# EAGLE board eBOOK-UPDATE v6 (EAGLE 9.7.0)
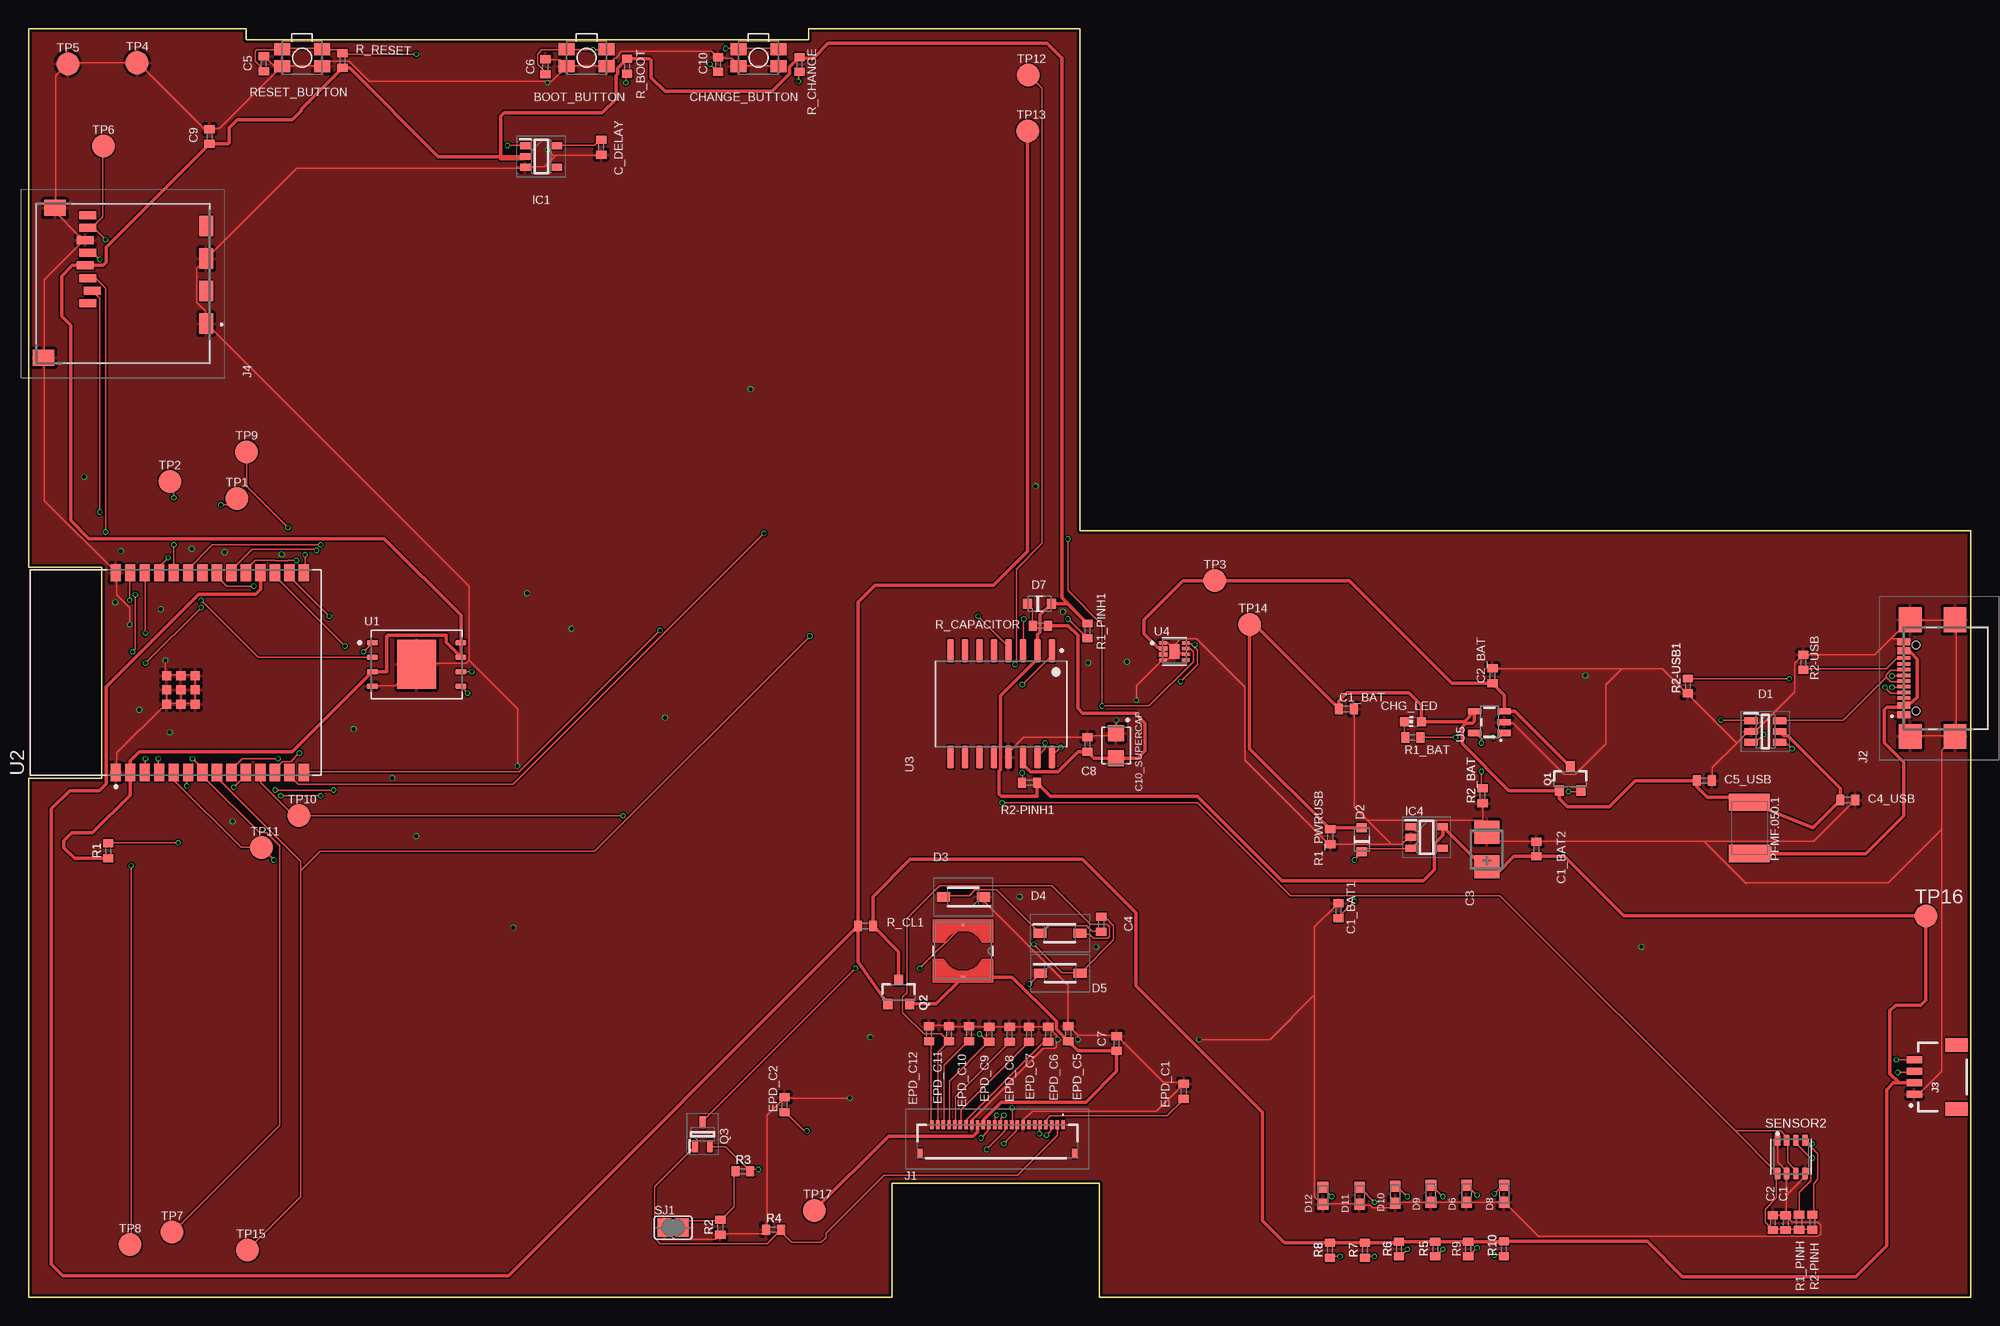
[diagram p0: board, top side]
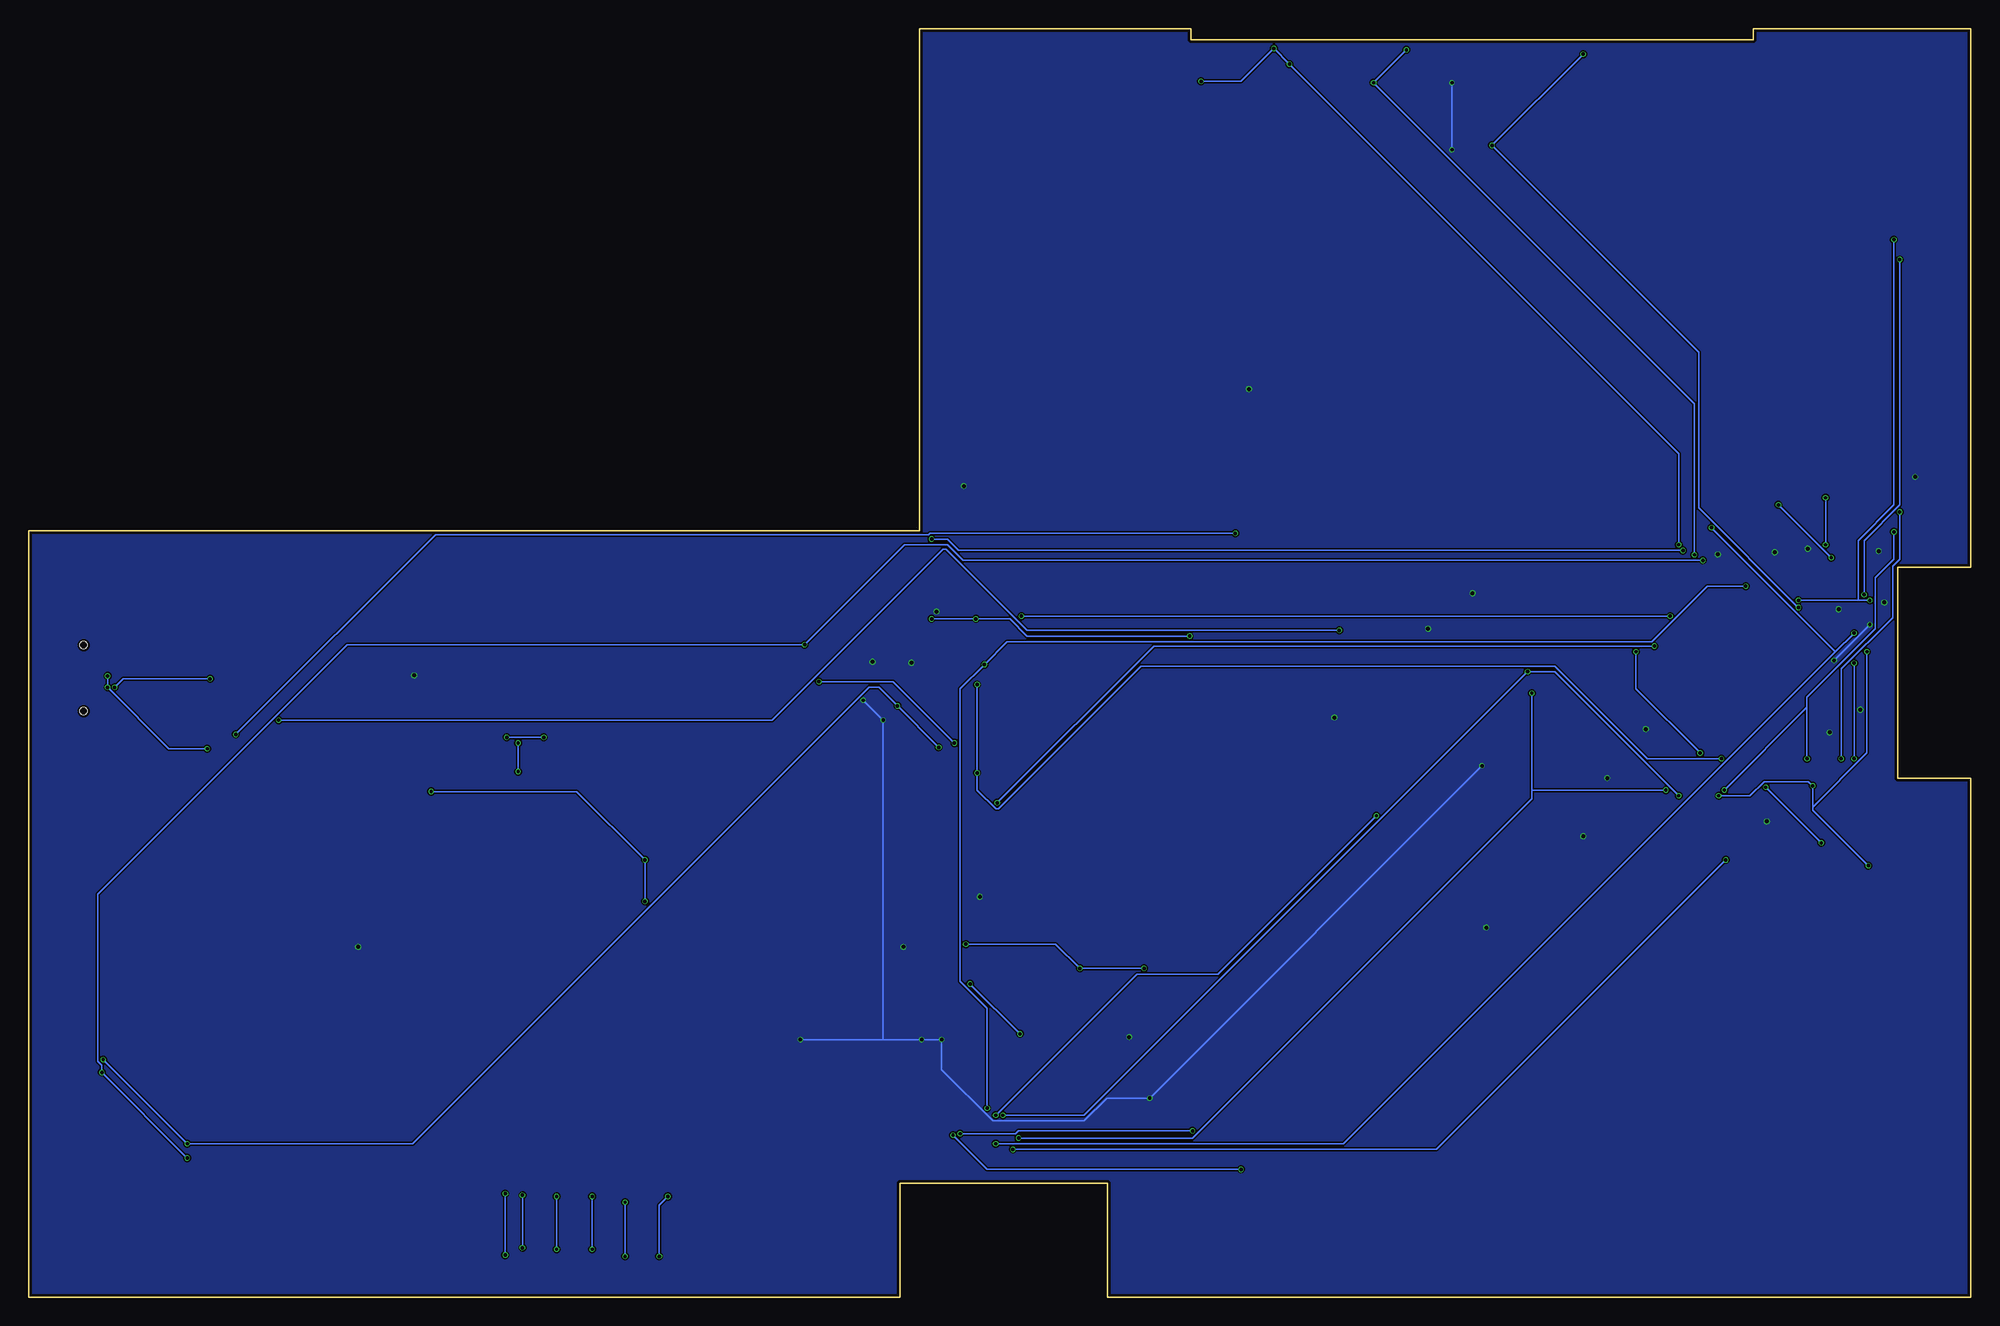
[diagram p1: board, bottom side, seen from below]

Size 170.3 x 111.2 mm. Coordinates in mm from the lower left corner, seen from the top.
Outline: 0,111.2 19.1,111.2 19.1,110.2 68.4,110.2 68.4,111.2 92.2,111.2 92.2,67.2 170.3,67.2 170.3,0 93.9,0 93.9,10 75.7,10 75.7,0 0,0 0,45.5 6.4,45.5 6.4,64 0,64 0,111.2
Copper layers (1*16): Top 0.035mm / dielectric 1.6mm / Bottom 0.035mm
Design rules "jlcpcb-2layers.dru *": minimum track width 5mil, minimum drill 0.3mm, track to track 5mil, track to pad 5mil, pad to pad 5mil, via to via 5mil, smd to smd 5mil, copper to edge 0.2mm, drill to drill 6mil, minimum pad ring 10mil, minimum via ring 3mil, stop-mask expansion 4mil, vias tented up to drill 0mil, thermal gap 10mil
Net classes: 0 default: width 0.15 mm; 1 POWER: width 0.3 mm

## Footprints (pad centres in the part's own frame; a part is rotated, then mirrored left to right if it is on the bottom)
MYBUTTON = smd 1.4 x 1.05: 1 1.75,0.75; 2 -1.75,0.75; 3 -1.75,-0.75; 4 1.75,-0.75
ESP32_WROVER_EAGLE-LTSPICE_C0402 = smd 0.7 x 0.9: 1 -0.65,0; 2 0.65,0
RCL_CT3528 = smd 2 x 2.2: + -1.5,0; - 1.5,0
CAPCP3225X100N = smd 1.4 x 1.4: 1 -1.1,0; 2 1.1,0
ADAFRUIT_CHIP-LED0603 = smd 0.8 x 0.8: A 0,-0.75; C 0,0.75
SOT95P280X145-6N = smd 1.2 x 0.6: 1 -1.25,0.95; 2 -1.25,0; 3 -1.25,-0.95; 4 1.25,-0.95; 5 1.25,0; 6 1.25,0.95
ESP32_WROVER_AVX---SD0805S020S1R0_AVX_SD0805S020S1R0_0 = smd 0.8 x 0.9: 1 -1.05,0; 2 1.05,0
SOD3716X135N = smd 1.15 x 0.8: 1 -1.75,0; 2 1.75,0
DIOC1608X36N = smd 0.97 x 0.94: 1 -0.75,0; 2 0.75,0
SOT95P280X125-5N = smd 0.9 x 0.6: 1 -1.4,0.95; 2 -1.4,0; 3 -1.4,-0.95; 4 1.4,-0.95; 5 1.4,0.95
SOT95P280X120-5N = smd 0.9 x 0.6: 1 -1.4,0.95; 2 -1.4,0; 3 -1.4,-0.95; 4 1.4,-0.95; 5 1.4,0.95
FH34SRJ24S05SH99 = smd 0.3 x 0.8: 1 5.75,1.45; 2 5.25,1.45; 3 4.75,1.45; 4 4.25,1.45; 5 3.75,1.45; 6 3.25,1.45; 7 2.75,1.45; 8 2.25,1.45; 9 1.75,1.45; 10 1.25,1.45; 11 0.75,1.45; 12 0.25,1.45; 13 -0.25,1.45; 14 -0.75,1.45; 15 -1.25,1.45; 16 -1.75,1.45; 17 -2.25,1.45; 18 -2.75,1.45; 19 -3.25,1.45; 20 -3.75,1.45; 21 -4.25,1.45; 22 -4.75,1.45; 23 -5.25,1.45; 24 -5.75,1.45 | smd 0.4 x 0.8: MP1 6.75,-1.05; MP2 -6.75,-1.05
SAMACSYS_PARTS_USB4110GFA = smd 0.3 x 1.15: A1 -3.35,3.678; A4 -2.55,3.678; A5 -1.25,3.678; A6 -0.25,3.678; A7 0.25,3.678; A8 1.25,3.678; A9 2.55,3.678; A12 3.35,3.678; B1 3.05,3.678; B4 2.25,3.678; B5 1.75,3.678; B6 0.75,3.678; B7 -0.75,3.678; B8 -1.75,3.678; B9 -2.25,3.678; B12 -3.05,3.678 | smd 2.18 x 2: MP1 -5.11,-0.827; MP2 5.11,-0.827; MP3 -5.11,3.103; MP4 5.11,3.103 | hole 0.65: -2.89,2.603; 2.89,2.603
JST04_1MM_RA = smd 0.6 x 1.35: 1 -1.5,0; 2 -0.5,0; 3 0.5,0; 4 1.5,0 | smd 1.2 x 2: NC1 2.8,-3.675; NC2 -2.8,-3.675
112ATAARR03ATTEND = smd 1.8 x 1.2: G1 10.6,10.4; G2 4.9,10.4; S1 7.75,10.4; S2 2.05,10.4 | smd 1.4 x 1.9: G3 13.6,-3.85; G4 0.45,-2.85 | smd 0.7 x 1.5: P1 8.8,0; P2 7.7,0.4; P3 6.6,0; P4 5.5,-0.2; P5 4.4,0; P6 3.3,-0.2; P7 2.2,0; P8 1.1,0
IND_4828-WE-TPC_WRE = smd 0.254 x 0.254: 1 -2.286,0 | smd 0.254 x 0.381: 2 2.286,0
ESP32C6_VARISTOR_CT/CN1812 = smd 1.5 x 3.6: 1 -2.25,0; 2 2.25,0
ESP32_WROVER_SPARKFUN-DISCRETESEMI_SOT23-3 = smd 0.8 x 0.9: 1 -0.95,-1; 2 0.95,-1; 3 0,1.1
SOT65P210X110-3N = smd 1.05 x 0.5: 1 -1.05,0.65; 2 -1.05,-0.65; 3 1.05,0
ESP32_WROVER_EAGLE-LTSPICE_R0402 = smd 0.7 x 0.9: 1 -0.65,0; 2 0.65,0
ESP32_WROVER_BME680_PSON80P300X300X100-8N = smd 1.016 x 0.5: 1 1.458,1.2; 2 1.458,0.4; 3 1.458,-0.4; 4 1.458,-1.2; 5 -1.458,-1.22; 6 -1.458,-0.4; 7 -1.458,0.4; 8 -1.458,1.2
SJ = smd 1.168 x 1.6: 1 -0.762,0; 2 0.762,0
TP20R = smd 2 x 2: TP 0,0
SON127P600X800X80-9N = smd 0.94 x 0.44: 1 -3.895,1.905; 2 -3.895,0.635; 3 -3.895,-0.635; 4 -3.895,-1.905; 5 3.895,-1.905; 6 3.895,-0.635; 7 3.895,0.635; 8 3.895,1.905 | smd 3.4 x 4.3: 9 0,0
XCVR_ESP32-C6-WROOM-1-N8 = smd 1.5 x 0.9: 1 -8.75,5.26; 2 -8.75,3.99; 3 -8.75,2.72; 4 -8.75,1.45; 5 -8.75,0.18; 6 -8.75,-1.09; 7 -8.75,-2.36; 8 -8.75,-3.63; 9 -8.75,-4.9; 10 -8.75,-6.17; 11 -8.75,-7.44; 12 -8.75,-8.71; 13 -8.75,-9.98; 14 -8.75,-11.25; 15 8.75,-11.25; 16 8.75,-9.98; 17 8.75,-8.71; 18 8.75,-7.44; 19 8.75,-6.17; 20 8.75,-4.9; 21 8.75,-3.63; 22 8.75,-2.36; 23 8.75,-1.09; 24 8.75,0.18; 25 8.75,1.45; 26 8.75,2.72; 27 8.75,3.99; 28 8.75,5.26 | smd 0.8 x 0.8: 29_1 -2.755,0.79; 29_2 -1.505,0.79; 29_3 -0.255,0.79; 29_4 -2.755,-0.46; 29_5 -1.505,-0.46; 29_6 -0.255,-0.46; 29_7 -2.755,-1.71; 29_8 -1.505,-1.71; 29_9 -0.255,-1.71
SOIC127P1032X265-16N = smd 2.05 x 0.59: 1 -4.655,4.445; 2 -4.655,3.175; 3 -4.655,1.905; 4 -4.655,0.635; 5 -4.655,-0.635; 6 -4.655,-1.905; 7 -4.655,-3.175; 8 -4.655,-4.445; 9 4.655,-4.445; 10 4.655,-3.175; 11 4.655,-1.905; 12 4.655,-0.635; 13 4.655,0.635; 14 4.655,1.905; 15 4.655,3.175; 16 4.655,4.445
SON50P200X200X80-9N = smd 0.76 x 0.27: 1 -0.985,0.75; 4 -0.985,-0.75; 5 0.985,-0.75; 6 0.985,-0.25; 7 0.985,0.25; 8 0.985,0.75 | smd 0.813 x 0.406: 2 -0.985,0.25; 3 -0.985,-0.25 | smd 0.9 x 1.3: 9 0,0
ESP32_WROVER_SPARKFUN-IC-POWER_SOT23-5 = smd 0.55 x 1.2: 1 -0.95,-1.3; 2 0,-1.3; 3 0.95,-1.3; 4 0.95,1.3; 5 -0.95,1.3

## Placement (x,y rotation side)
BOOT_BUTTON  BUTTON_CUSYOMV1  [MYBUTTON]  48.93,108.62 180 top
C1  100nF  [ESP32_WROVER_EAGLE-LTSPICE_C0402]  154.05,6.54 90 top
C1_BAT  4.7uF  [ESP32_WROVER_EAGLE-LTSPICE_C0402]  115.54,51.56 0 top
C1_BAT1  4.7uF  [ESP32_WROVER_EAGLE-LTSPICE_C0402]  114.85,33.88 90 top
C1_BAT2  4.7uF  [ESP32_WROVER_EAGLE-LTSPICE_C0402]  132.19,39.28 90 top
C2  100nF  [ESP32_WROVER_EAGLE-LTSPICE_C0402]  152.93,6.54 90 top
C2_BAT  4.7uF  [ESP32_WROVER_EAGLE-LTSPICE_C0402]  128.35,54.46 90 top
C3  100uF TANT  [RCL_CT3528]  127.85,39.24 90 top
C4  4.7uF/25V  [ESP32_WROVER_EAGLE-LTSPICE_C0402]  94.05,32.7 90 top
C4_USB  100nF  [ESP32_WROVER_EAGLE-LTSPICE_C0402]  159.5,43.58 0 top
C5  1uF  [ESP32_WROVER_EAGLE-LTSPICE_C0402]  20.63,108.12 90 top
C5_USB  4.7uF  [ESP32_WROVER_EAGLE-LTSPICE_C0402]  146.91,45.28 0 top
C6  100nF  [ESP32_WROVER_EAGLE-LTSPICE_C0402]  45.31,107.84 90 top
C7  10uF  [ESP32_WROVER_EAGLE-LTSPICE_C0402]  95.4,22.24 90 top
C8  100nF  [ESP32_WROVER_EAGLE-LTSPICE_C0402]  92.85,48.44 90 top
C9  100nF  [ESP32_WROVER_EAGLE-LTSPICE_C0402]  15.87,101.74 90 top
C10  100nF  [ESP32_WROVER_EAGLE-LTSPICE_C0402]  60.45,108.04 90 top
C10_SUPERCAP  CPH3225A  [CAPCP3225X100N]  95.36,48.35 270 top
C_DELAY  100nF  [ESP32_WROVER_EAGLE-LTSPICE_C0402]  50.21,100.8 270 top
CHANGE_BUTTON  BUTTON_CUSYOMV1  [MYBUTTON]  64,108.62 180 top
CHG_LED  [ADAFRUIT_CHIP-LED0603]  121.38,50.45 90 top
D1  USBLC6-2SC6Y  [SOT95P280X145-6N]  152.28,49.58 0 top
D2  ESP32_WROVER_AVX---SD0805S020S1R0_AVX_SD0805S020S1R0_0_0AVX_SD0805S020S1R0_0_0  [ESP32_WROVER_AVX---SD0805S020S1R0_AVX_SD0805S020S1R0_0]  116.89,40.09 90 top
D3  MBR0530  [SOD3716X135N]  81.96,35.08 180 top
D4  MBR0530  [SOD3716X135N]  90.42,31.89 0 top
D5  MBR0530  [SOD3716X135N]  90.46,28.39 0 top
D6  PGB1010603MR  [DIOC1608X36N]  126.08,9.08 90 top
D7  ESP32_WROVER_AVX---SD0805S020S1R0_AVX_SD0805S020S1R0_0_0AVX_SD0805S020S1R0_0_0  [ESP32_WROVER_AVX---SD0805S020S1R0_AVX_SD0805S020S1R0_0]  88.64,60.79 0 top
D8  PGB1010603MR  [DIOC1608X36N]  129.36,9.08 90 top
D9  PGB1010603MR  [DIOC1608X36N]  122.94,9.08 90 top
D10  PGB1010603MR  [DIOC1608X36N]  119.82,8.98 90 top
D11  PGB1010603MR  [DIOC1608X36N]  116.7,8.88 90 top
D12  PGB1010603MR  [DIOC1608X36N]  113.48,8.88 90 top
EPD_C1  1uF/50V  [ESP32_WROVER_EAGLE-LTSPICE_C0402]  101.28,18.06 90 top
EPD_C2  1uF/50V  [ESP32_WROVER_EAGLE-LTSPICE_C0402]  66.29,16.86 90 top
EPD_C5  0.1uF/50V  [ESP32_WROVER_EAGLE-LTSPICE_C0402]  91.15,23.1 90 top
EPD_C6  1uF/50V  [ESP32_WROVER_EAGLE-LTSPICE_C0402]  89.4,23.06 90 top
EPD_C7  1uF/50V  [ESP32_WROVER_EAGLE-LTSPICE_C0402]  87.71,23.06 90 top
EPD_C8  1uF/50V  [ESP32_WROVER_EAGLE-LTSPICE_C0402]  86.02,23.06 90 top
EPD_C9  1uF/50V  [ESP32_WROVER_EAGLE-LTSPICE_C0402]  84.23,23.06 90 top
EPD_C10  1uF/50V  [ESP32_WROVER_EAGLE-LTSPICE_C0402]  82.45,23.1 90 top
EPD_C11  1uF/50V  [ESP32_WROVER_EAGLE-LTSPICE_C0402]  80.71,23.08 90 top
EPD_C12  1uF/50V  [ESP32_WROVER_EAGLE-LTSPICE_C0402]  78.95,23.1 90 top
IC1  BD5229G-TR  [SOT95P280X125-5N]  44.95,99.98 0 top
IC4  XC6220A331MR-G  [SOT95P280X120-5N]  122.58,40.3 0 top
J1  FH34SRJ-24S-0.5SH_99_  [FH34SRJ24S05SH99]  84.95,13.65 0 top
J2  SAMACSYS_PARTS_USB4110-GF-A  [SAMACSYS_PARTS_USB4110GFA]  168.07,54.26 90 top
J3  QWIIC_RIGHT_ANGLE  [JST04_1MM_RA]  165.35,19.3 90 top
J4  112A-TAAR-R03_ATTEND  [112ATAARR03ATTEND]  5.18,95.93 270 top
L1  68uH  [IND_4828-WE-TPC_WRE]  81.93,30.35 270 top
PFMF.050.1  ESP32C6_VARISTORCN1812  [ESP32C6_VARISTOR_CT/CN1812]  150.88,41.14 90 top
Q1  20V/4.2A/52mΩ/1.4W  [ESP32_WROVER_SPARKFUN-DISCRETESEMI_SOT23-3]  135.16,45.41 0 top
Q2  20V/4.2A/52mΩ/1.4W  [ESP32_WROVER_SPARKFUN-DISCRETESEMI_SOT23-3]  76.28,26.71 0 top
Q3  SI1308EDL-T1-GE3  [SOT65P210X110-3N]  59.09,14.29 90 top
R1  10K  [ESP32_WROVER_EAGLE-LTSPICE_R0402]  6.99,39.12 90 top
R1_BAT  200  [ESP32_WROVER_EAGLE-LTSPICE_R0402]  121.36,49.06 0 top
R1_PINH  10K  [ESP32_WROVER_EAGLE-LTSPICE_R0402]  155.23,6.58 90 top
R1_PINH1  10K  [ESP32_WROVER_EAGLE-LTSPICE_R0402]  92.85,58.4 90 top
R1_PWRUSB  100K  [ESP32_WROVER_EAGLE-LTSPICE_R0402]  114.12,40.35 90 top
R2  2.2  [ESP32_WROVER_EAGLE-LTSPICE_R0402]  60.65,6.12 90 top
R2-PINH  10K  [ESP32_WROVER_EAGLE-LTSPICE_R0402]  156.39,6.58 90 top
R2-PINH1  10K  [ESP32_WROVER_EAGLE-LTSPICE_R0402]  87.77,45.1 0 top
R2-USB  5k1  [ESP32_WROVER_EAGLE-LTSPICE_R0402]  155.59,55.64 90 top
R2-USB1  5k1  [ESP32_WROVER_EAGLE-LTSPICE_R0402]  145.47,53.58 90 top
R2_BAT  2K  [ESP32_WROVER_EAGLE-LTSPICE_R0402]  127.48,43.94 90 top
R3  0.47  [ESP32_WROVER_EAGLE-LTSPICE_R0402]  62.62,11.04 0 top
R4  10K  [ESP32_WROVER_EAGLE-LTSPICE_R0402]  65.31,5.92 0 top
R5  10K  [ESP32_WROVER_EAGLE-LTSPICE_R0402]  123.33,4.22 90 top
R6  10K  [ESP32_WROVER_EAGLE-LTSPICE_R0402]  120.15,4.22 90 top
R7  10K  [ESP32_WROVER_EAGLE-LTSPICE_R0402]  117.17,4.12 90 top
R8  10K  [ESP32_WROVER_EAGLE-LTSPICE_R0402]  114.09,4.12 90 top
R9  10K  [ESP32_WROVER_EAGLE-LTSPICE_R0402]  126.21,4.22 90 top
R10  10K  [ESP32_WROVER_EAGLE-LTSPICE_R0402]  129.34,4.24 90 top
R_BOOT  10K  [ESP32_WROVER_EAGLE-LTSPICE_R0402]  52.48,107.88 90 top
R_CAPACITOR  15  [ESP32_WROVER_EAGLE-LTSPICE_R0402]  88.72,58.85 0 top
R_CHANGE  10K  [ESP32_WROVER_EAGLE-LTSPICE_R0402]  67.59,108.05 90 top
R_CL1  10K  [ESP32_WROVER_EAGLE-LTSPICE_R0402]  73.37,32.54 0 top
R_RESET  10K  [ESP32_WROVER_EAGLE-LTSPICE_R0402]  27.53,108.4 270 top
RESET_BUTTON  BUTTON_CUSYOMV1  [MYBUTTON]  23.99,108.65 180 top
SENSOR2  ESP32_WROVER_BME680_BME680  [ESP32_WROVER_BME680_PSON80P300X300X100-8N]  154.54,12.3 90 top
SJ1  [SJ]  56.51,6.1 0 top
TP1  TPTP20R  [TP20R]  18.26,70 0 top
TP2  TPTP20R  [TP20R]  12.38,71.5 0 top
TP3  TPTP20R  [TP20R]  104,62.8 0 top
TP4  TPTP20R  [TP20R]  9.52,108.2 0 top
TP5  TPTP20R  [TP20R]  3.44,108.1 0 top
TP6  TPTP20R  [TP20R]  6.56,100.9 0 top
TP7  TPTP20R  [TP20R]  12.58,5.7 0 top
TP8  TPTP20R  [TP20R]  8.9,4.6 0 top
TP9  TPTP20R  [TP20R]  19.12,74.1 0 top
TP10  TPTP20R  [TP20R]  23.7,42.22 0 top
TP11  TPTP20R  [TP20R]  20.44,39.4 0 top
TP12  TPTP20R  [TP20R]  87.65,107.12 0 top
TP13  TPTP20R  [TP20R]  87.6,102.22 0 top
TP14  TPTP20R  [TP20R]  107.05,58.97 0 top
TP15  TPTP20R  [TP20R]  19.2,4.12 0 top
TP16  TPTP20R  [TP20R]  166.35,33.42 0 top
TP17  TPTP20R  [TP20R]  68.89,7.6 0 top
U1  W25Q512JVEIQ  [SON127P600X800X80-9N]  34.03,55.46 0 top
U2  ESP32-C6-WROOM-1-N8  [XCVR_ESP32-C6-WROOM-1-N8]  12.9,54.74 90 top
U3  DS3231SN#  [SOIC127P1032X265-16N]  85.29,52 270 top
U4  MAX17048G+T10  [SON50P200X200X80-9N]  100.47,56.6 0 top
U5  ESP32_WROVER_SPARKFUN-IC-POWER_MCP73831  [ESP32_WROVER_SPARKFUN-IC-POWER_SOT23-5]  128.08,50.4 90 top

## Library data of the parts
BOOT_BUTTON CHANGE_BUTTON CHG_LED PFMF.050.1 RESET_BUTTON SJ1 TP1-TP17 = DeskAssistant v19 v1
C1 C1_BAT C1_BAT1 C1_BAT2 C2 C2_BAT C4 C4_USB C5 C5_USB C6-C10 C_DELAY EPD_C1 EPD_C2 EPD_C5-EPD_C12 = DeskAssistant v19 v1; SPICEMODEL: NONE; SPICEPREFIX: C
C3 = DeskAssistant v19 v1; SPICEPREFIX: C
C10_SUPERCAP = DeskAssistant v19 v1; AVAILABILITY: Not in stock; CHECK_PRICES: https://www.snapeda.com/parts/CPH3225A/Seiko+Instruments/view-part/?ref=eda; DESCRIPTION: 11 mF (EDLC) Supercapacitor 3.3 V 1210 (3225 Metric) - -; MF: Seiko Instruments; MP: CPH3225A; PACKAGE: 1210 Seiko; PRICE: None; PURCHASE-URL: https://www.snapeda.com/api/url_track_click_mouser/?unipart_id=562593&manufacturer=Seiko Instruments&part_name=CPH3225A&search_term=None; SNAPEDA_LINK: https://www.snapeda.com/parts/CPH3225A/Seiko+Instruments/view-part/?ref=snap
D1 = DeskAssistant v19 v1; AVAILABILITY: In Stock; CHECK_PRICES: https://www.snapeda.com/parts/USBLC6-2SC6Y/STMicroelectronics/view-part/?ref=eda; DESCRIPTION: 17V Clamp 5A (8/20µs) Ipp Tvs Diode Surface Mount SOT-23-6; MF: STMicroelectronics; MP: USBLC6-2SC6Y; PACKAGE: SOT-23-6 STMicroelectronics; PRICE: None; SNAPEDA_LINK: https://www.snapeda.com/parts/USBLC6-2SC6Y/STMicroelectronics/view-part/?ref=snap
D2 D7 = DeskAssistant v19 v1; CENTROID_NOT_SPECIFIED: No; DATASHEET: http://datasheets.avx.com/schottky.pdf; DIGIKEY_DESCRIPTION: DIODE SCHOTTKY 20V 1A 0805; DIGIKEY_PART_NUMBER: 478-7800-1-ND; LEAD_FREE: yes; MF: AVX; MOUSER_PART_NUMBER: 581-SD0805S020S1R0; PACKAGE: 0805 (2012 metric); PREFIX: D; ROHS: yes; TEMPERATURE_RANGE_HIGH: +125°C; TEMPERATURE_RANGE_LOW: -55°C
D3-D5 = DeskAssistant v19 v1; AVAILABILITY: In Stock; CHECK_PRICES: https://www.snapeda.com/parts/MBR0530/Onsemi/view-part/?ref=eda; DESCRIPTION: Diode Schottky 30 V 500mA Surface Mount SOD-123; MF: ON Semiconductor; MP: MBR0530; PACKAGE: SOD-123-2 ON Semiconductor; PRICE: None; PURCHASE-URL: https://www.snapeda.com/api/url_track_click_mouser/?unipart_id=179458&manufacturer=ON Semiconductor&part_name=MBR0530&search_term=None; SNAPEDA_LINK: https://www.snapeda.com/parts/MBR0530/Onsemi/view-part/?ref=snap
D6 D8-D12 = DeskAssistant v19 v1; AVAILABILITY: In Stock; CHECK_PRICES: https://www.snapeda.com/parts/PGB1010603MR/Littelfuse/view-part/?ref=eda; DESCRIPTION: 150V (Typ) Clamp - Ipp Tvs Diode Surface Mount 0603 (1608 Metric); MF: Littelfuse Inc.; MP: PGB1010603MR; PACKAGE: 0603 Littelfuse Inc.; PRICE: None; PURCHASE-URL: https://www.snapeda.com/api/url_track_click_mouser/?unipart_id=5659453&manufacturer=Littelfuse Inc.&part_name=PGB1010603MR&search_term=None; SNAPEDA_LINK: https://www.snapeda.com/parts/PGB1010603MR/Littelfuse/view-part/?ref=snap
IC1 = DeskAssistant v19 v1; DESCRIPTION: Voltage Detector with Adjustable Delay Time: CMOS processes are utilized to develop high precision, low current consumption CMOS reset ICs that allow arbitrary setting of the delay time. The extensive lineup includes both Nch Open Drain and CMOS output types in a wide range of detection voltages (from 2.3V to 6.0V, in 0.1V steps), enabling selection of the ideal solution based on customer requirements. In addition, the entire series is of course both lead-free and RoHS-compliant.; HEIGHT: 1.25mm; MANUFACTURER_NAME: ROHM Semiconductor; MANUFACTURER_PART_NUMBER: BD5229G-TR; MOUSER_PART_NUMBER: 755-BD5229G-TR; MOUSER_PRICE-STOCK: https://www.mouser.co.uk/ProductDetail/ROHM-Semiconductor/BD5229G-TR?qs=4kLU8WoGk0vvnhrrYwdszw%3D%3D
IC4 = DeskAssistant v19 v1; DESCRIPTION: LDO Voltage Regulators; HEIGHT: 1.2mm; MANUFACTURER_NAME: Torex; MANUFACTURER_PART_NUMBER: XC6220A331MR-G; MOUSER_PART_NUMBER: 865-XC6220A331MR-G; MOUSER_PRICE-STOCK: https://www.mouser.co.uk/ProductDetail/Torex-Semiconductor/XC6220A331MR-G?qs=AsjdqWjXhJ8ZSWznL1J0gg%3D%3D
J1 = DeskAssistant v19 v1; DESCRIPTION: 24 Position FFC, FPC Connector Contacts, Top and Bottom 0.020" (0.50mm) Surface Mount, Right Angle; HEIGHT: 1.1mm; MANUFACTURER_NAME: Hirose; MANUFACTURER_PART_NUMBER: FH34SRJ-24S-0.5SH(99); MOUSER_PART_NUMBER: 798-FH34SRJ24S05SH99; MOUSER_PRICE-STOCK: https://www.mouser.co.uk/ProductDetail/Hirose-Connector/FH34SRJ-24S-0.5SH99?qs=vcbW%252B4%252BSTIpKBl5ap9J8Fw%3D%3D
J2 = DeskAssistant v19 v1; DESCRIPTION: CONN USB 2.0 TYPE-C R/A SMT; HEIGHT: 3.26mm; MANUFACTURER_NAME: GCT (GLOBAL CONNECTOR TECHNOLOGY); MANUFACTURER_PART_NUMBER: USB4110-GF-A; MOUSER_PART_NUMBER: 640-USB4110-GF-A; MOUSER_PRICE-STOCK: https://www.mouser.co.uk/ProductDetail/GCT/USB4110-GF-A?qs=KUoIvG%2F9IlYiZvIXQjyJeA%3D%3D
J3 = DeskAssistant v19 v1; PROD_ID: CONN-13694
J4 = DeskAssistant v19 v1; DESCRIPTION: Micro SD Card Socket, Push-Push Type, Top Mount, SMT, H=1.83mm, 10u; HEIGHT: 1.9mm; MANUFACTURER_NAME: ATTEND; MANUFACTURER_PART_NUMBER: 112A-TAAR-R03 ATTEND
L1 = DeskAssistant v19 v1; COPYRIGHT: Copyright (C) 2024 Ultra Librarian. All rights reserved.; MANUFACTURER_PART_NUMBER: 744043680; MFR_NAME: Wurth Electronics
Q1 Q2 = DeskAssistant v19 v1; PROD_ID: TRAN-14388
Q3 = DeskAssistant v19 v1; AVAILABILITY: In Stock; CHECK_PRICES: https://www.snapeda.com/parts/SI1308EDL-T1-GE3/Vishay+Siliconix/view-part/?ref=eda; DESCRIPTION: Si1308EDL-T1-GE3 N-channel MOSFET Transistor, 1.5 A, 30 V, 3-Pin SC-70 | Siliconix / Vishay SI1308EDL-T1-GE3; MF: Vishay Siliconix; MP: SI1308EDL-T1-GE3; PACKAGE: SOT-323 Vishay Semiconductor; PRICE: None; PURCHASE-URL: https://www.snapeda.com/api/url_track_click_mouser/?unipart_id=274603&manufacturer=Vishay Siliconix&part_name=SI1308EDL-T1-GE3&search_term=None; SNAPEDA_LINK: https://www.snapeda.com/parts/SI1308EDL-T1-GE3/Vishay+Siliconix/view-part/?ref=snap
R1 R1_BAT R1_PINH R1_PINH1 R1_PWRUSB R2 R2-PINH R2-PINH1 R2-USB R2-USB1 R2_BAT R3-R10 R_BOOT R_CAPACITOR R_CHANGE R_CL1 R_RESET = DeskAssistant v19 v1; SPICEMODEL: NONE; SPICEPREFIX: R
SENSOR2 = DeskAssistant v19 v1; AVAILABILITY: Unavailable; DESCRIPTION: Integrated Environmental Unit; MF: Bosch Sensortec; MP: BME680; PACKAGE: LGA-8 Bosch Tools; PRICE: None
U1 = DeskAssistant v19 v1; AVAILABILITY: In Stock; CHECK_PRICES: https://www.snapeda.com/parts/W25Q512JVEIQ/Winbond+Electronics/view-part/?ref=eda; DESCRIPTION: FLASH - NOR Memory IC 512Mb (64M x 8) SPI - Quad I/O 133 MHz 8-WSON (8x6); MF: Winbond Electronics; MP: W25Q512JVEIQ; PACKAGE: Package; PRICE: None; SNAPEDA_LINK: https://www.snapeda.com/parts/W25Q512JVEIQ/Winbond+Electronics/view-part/?ref=snap
U2 = DeskAssistant v19 v1; AVAILABILITY: In Stock; CHECK_PRICES: https://www.snapeda.com/parts/ESP32-C6-WROOM-1-N8/Espressif+Systems/view-part/?ref=eda; DESCRIPTION: Multiprotocol Modules ESP32-C6 module, Wi-Fi 6 in 2.4 GHz band, Bluetooth 5, Zigbee 3.0 and Thread. ESP34-WROOM Compatible - ENGINEERING SAMPLE; MF: Espressif Systems; MP: ESP32-C6-WROOM-1-N8; PACKAGE: None; PRICE: None; SNAPEDA_LINK: https://www.snapeda.com/parts/ESP32-C6-WROOM-1-N8/Espressif+Systems/view-part/?ref=snap
U3 = DS3231SN_; AVAILABILITY: Not in stock; CHECK_PRICES: https://www.snapeda.com/parts/DS3231SN%23/Maxim+Integrated/view-part/?ref=eda; DESCRIPTION: Real Time Clock (RTC) IC Clock/Calendar I2C, 2-Wire Serial 16-SOIC (0.295, 7.50mm Width); MF: Maxim Integrated Products; MP: DS3231SN#; PACKAGE: None; PRICE: None; SNAPEDA_LINK: https://www.snapeda.com/parts/DS3231SN%23/Maxim+Integrated/view-part/?ref=snap
U4 = DeskAssistant v19 v1; AVAILABILITY: In Stock; CHECK_PRICES: https://www.snapeda.com/parts/MAX17048G+T10/Analog+Devices/view-part/?ref=eda; DESCRIPTION: 3µA 1-Cell/2-Cell Fuel Gauge with ModelGauge; MF: Analog Devices; MP: MAX17048G+T10; PACKAGE: TDFN-8 Maxim; PRICE: None; PURCHASE-URL: https://www.snapeda.com/api/url_track_click_mouser/?unipart_id=329239&manufacturer=Analog Devices&part_name=MAX17048G+T10&search_term=None; SNAPEDA_LINK: https://www.snapeda.com/parts/MAX17048G+T10/Analog+Devices/view-part/?ref=snap
U5 = DeskAssistant v19 v1; PROD_ID: IC-09995

## Nets
3V3 [POWER]: C1_BAT2.1 C3.+ C9.1 D7.2 IC1.2 IC4.5 J3.2 J4.P4 Q2.3 R1.1 R1_PINH1.2 R2-PINH1.2 R5.2 R6.2 R7.2 R8.2 R9.2 R10.2 R_BOOT.2 R_CHANGE.2 R_CL1.2 R_RESET.2 TP16.TP U1.3 U1.7 U1.8 U2.2 U3.2
32KHZ: R2-PINH1.1 U2.9 U3.1
DN: D1.4 J2.A7 J2.B7
DP: D1.6 J2.A6 J2.B6
EPD_3V3 [POWER]: C7.1 EPD_C5.1 J1.15 J1.16 L1.2 Q2.2 TP17.TP
EPD_3V3_C [POWER]: Q2.1 R_CL1.1 TP13.TP U2.18
EPD_BUSY: J1.9 TP9.TP U2.26
EPD_CS: J1.12 TP10.TP U2.11
EPD_DC: J1.11 TP11.TP U2.5
EPD_RST: J1.10 TP12.TP U2.21
FLASH_CS: U1.1 U2.12
GDR: J1.2 Q3.1 R4.2
GND: BOOT_BUTTON.1 BOOT_BUTTON.2 C1.2 C1_BAT1.2 C1_BAT2.2 C1_BAT.2 C2.2 C2_BAT.2 C3.- C4_USB.2 C5.2 C5_USB.2 C6.2 C7.2 C8.2 C9.2 C10.2 C10_SUPERCAP.1 C_DELAY.2 CHANGE_BUTTON.1 CHANGE_BUTTON.2 D1.2 D3.1 D6.1 D8.1 D9.1 D10.1 D11.1 D12.1 EPD_C1.2 EPD_C2.2 EPD_C5.2 EPD_C6.2 EPD_C7.2 EPD_C8.2 EPD_C9.2 EPD_C10.2 EPD_C11.2 EPD_C12.2 IC1.3 IC4.2 J1.8 J1.17 J2.A1 J2.A12 J2.B1 J2.B12 J2.MP1 J2.MP2 J2.MP3 J2.MP4 J3.1 J4.G1 J4.G2 J4.G3 J4.G4 J4.P6 R1_PWRUSB.1 R2-USB1.1 R2-USB.2 R2.1 R2_BAT.1 R4.1 RESET_BUTTON.1 RESET_BUTTON.2 SENSOR2.1 SENSOR2.5 SENSOR2.7 SJ1.1 TP4.TP TP5.TP U1.4 U1.9 U2.1 U2.28 U2.29_1 U2.29_2 U2.29_3 U2.29_4 U2.29_5 U2.29_6 U2.29_7 U2.29_8 U2.29_9 U3.13 U4.1 U4.4 U4.6 U4.9 U5.2
GPIO8: R1.2 U2.10
I2C_PW: C1.1 C2.1 R1_PINH.1 R2-PINH.1 SENSOR2.2 SENSOR2.6 SENSOR2.8 U2.17
INT_RTC: R1_PINH1.1 TP15.TP U2.8 U3.3
IO/BOOT: BOOT_BUTTON.3 BOOT_BUTTON.4 C6.1 R_BOOT.1 U2.15
IO/CHANGE: C10.1 CHANGE_BUTTON.3 CHANGE_BUTTON.4 R_CHANGE.1 U2.23
MISO: J4.P7 TP6.TP U1.2 U2.27
MOSI: J1.14 J4.P3 TP7.TP U1.5 U2.7
N$1: D7.1 R_CAPACITOR.1
N$2: D8.2 R10.1
N$3: D6.2 R9.1
N$4: D9.2 R5.1
N$5: D10.2 R6.1
N$6: D11.2 R7.1
N$7: D12.2 R8.1
N$8: C_DELAY.1 IC1.5
N$9: J2.A5 R2-USB1.2
N$10: C1_BAT1.1 D2.1 IC4.1 IC4.3 Q1.2
N$11: R1_BAT.2 U5.1
N$12: CHG_LED.C R1_BAT.1
N$13: J2.B5 R2-USB.1
N$16: R2_BAT.2 U5.5
N$20: EPD_C10.1 J1.22
N$22: C4.1 D3.2 D4.1
N$23: EPD_C12.1 J1.24
N$25: EPD_C8.1 J1.20
N$26: EPD_C7.1 J1.19
N$27: EPD_C6.1 J1.18
N$28: EPD_C2.1 J1.5
N$30: EPD_C1.1 J1.4
PREVGH: D5.1 EPD_C9.1 J1.21
PREVGL: D4.2 EPD_C11.1 J1.23
RESE: J1.3 Q3.2 R3.2
RESE': R2.2 R3.1 SJ1.2
RESET: C5.1 IC1.1 R_RESET.1 RESET_BUTTON.3 RESET_BUTTON.4 U2.3
RTC_RST: U2.16 U3.4
RX: TP2.TP U2.24
SCK: J1.13 J4.P5 TP8.TP U1.6 U2.6
SCL: J3.4 R2-PINH.2 SENSOR2.4 U2.20 U3.16 U4.7
SDA: J3.3 R1_PINH.2 SENSOR2.3 U2.19 U3.15 U4.8
SRC: C4.2 D5.2 L1.1 Q3.3
SS_SD: J4.P2 U2.4
TX: TP1.TP U2.25
USB_D+: D1.1 U2.14
USB_D-: D1.3 U2.13
VBAT [POWER]: C2_BAT.1 Q1.3 TP3.TP U4.2 U4.3 U5.3
VBUS [POWER]: C1_BAT.1 C4_USB.1 C5_USB.1 CHG_LED.A D1.5 D2.2 PFMF.050.1.2 Q1.1 R1_PWRUSB.2 TP14.TP U5.4
VRTC [POWER]: C8.1 C10_SUPERCAP.2 R_CAPACITOR.2 U3.14
VUSB [POWER]: J2.A4 J2.A9 J2.B4 J2.B9 PFMF.050.1.1

## Tracks (layer width: path | path; a pad name or v marks a point on that pad's centre or on a via)
3V3
  Top 0.3: R_CHANGE.2 67.5,108.61 | 67.5,108.61 66.73,107.84 66.73,107.23 65.19,105.7 55.8,105.7 54.6,106.9 54.6,108.4 54.47,108.53 R_BOOT.2 51.66,107.71 51.66,107.23 51.5,107.08 51.5,105 50.3,103.8 41.7,103.8 41.4,103.5 41.4,99.8 43.37,99.8 IC1.2 35.92,99.98 28.15,107.75 R_RESET.2 23.9,104.12 23.9,104 23.1,103.2 18.3,103.2 17.6,102.5 17.6,101.2 17.49,101.09 C9.1 6.8,92.02 6.8,90.7 6.53,90.43 J4.P4 3.83,90.43 2.9,89.5 2.9,86 3.7,85.2 3.7,68.1 5.3,66.5 31.2,66.5 37.92,59.78 U1.8 U1.7 36.6,57.42 36.6,58 31.5,58 31.4,57.9 31.4,54.8 30.16,54.8 U1.3 23.11,47.8 9.7,47.8 8.91,47.01 U2.2 8.91,44.01 5.6,40.7 3.8,40.7 3.1,40 3.1,39.4 4.03,38.47 R1.1 | 67.5,108.61 68.81,108.61 70.1,109.9 89.3,109.9 90.6,108.6 90.6,61.3 R1_PINH1.2 91.11,60.79 D7.2 88.7,59.8 88.7,58.28 88.47,58.05 U3.2 88.5,56.62 88.5,56 85.23,52.73 85.23,46.25 85.1,46.12 85.1,44.1 85.3,43.9 88.4,43.9 88.42,43.92 R2-PINH1.2 89.62,43.9 102.5,43.9 109.9,36.5 122.3,36.5 123.25,37.45 123.25,39.77 123.98,40.49 IC4.5 127.49,37.74 C3.+ 128.39,37.2 128.8,37.2 130.23,38.63 C1_BAT2.1 134.67,38.63 139.88,33.42 TP16.TP 166.35,26.05 165.9,25.6 163.7,25.6 163.2,25.1 163.2,19.6 164,18.8 J3.2 163.5,18.8 162.9,18.2 162.9,4.5 160.2,1.8 145,1.8 141.91,4.89 R10.2 129.32,4.87 R9.2 R5.2 R6.2 120.05,4.77 R7.2 R8.2 110.13,4.77 108.2,6.7 108.2,16.2 97.1,27.3 97.1,33.7 92.4,38.4 77.3,38.4 74.02,35.12 R_CL1.2 76.28,30.28 Q2.3
32KHZ  (via drill 0.3)
  Top 0.15: v87.12,45.95 87.12,45.2 R2-PINH1.1 | v87.12,53.7 89.62,56.2 89.62,56.58 U3.1 | v21.88,47.2 18.75,47.2 17.88,46.33 17.88,46.08 U2.9
  Bottom 0.15: v87.12,53.7 v87.12,45.95 87.12,44.45 85.5,42.83 85.25,42.83 72.75,55.33 36.5,55.33 28.38,47.2 v21.88,47.2
DN  (via drill 0.3)
  Top 0.15: v163.38,53.45 164.38,53.45 J2.B7 | v163.38,54.45 164.38,54.45 J2.A7 | v154.62,48.08 154.12,48.58 153.62,48.58 D1.4
  Bottom 0.15: v163.38,54.45 v163.38,53.45 158,48.08 v154.62,48.08
DP
  Top 0.15: 162.88,54.33 163.25,53.95 164.38,53.95 J2.A6 | 162.88,54.33 162.88,54.58 163.25,54.95 164.38,54.95 J2.B6 | 162.88,54.33 159.12,50.58 153.62,50.58 D1.6
EPD_3V3
  Top 0.3: TP17.TP 75.39,14.1 82.8,14.1 83.2,14.5 J1.16 J1.15 83.77,15.17 83.77,15.61 85.26,17.1 92.7,17.1 95.4,19.8 C7.1 92.01,21.59 EPD_C5.1 90.13,23.47 90.13,24.17 86.24,28.06 L1.2 79.58,25.71 Q2.2
EPD_3V3_C
  Top 0.3: TP13.TP 87.6,65.4 84.6,62.4 74.2,62.4 72.72,60.92 R_CL1.1 | R_CL1.1 72.72,29.4 Q2.1 | U2.18 20.34,62.04 19.9,61.6 14.93,61.6 6.83,53.5 6.83,45.03 6.2,44.4 3.6,44.4 2,42.8 2,2.9 3,1.9 42.08,1.9 R_CL1.1
EPD_BUSY  (via drill 0.3)
  Top 0.15: v85.5,13.45 86.62,14.57 86.62,15.07 J1.9 | v10.25,58.2 10.25,63.45 U2.26 | v22.75,67.45 19.12,71.08 19.12,74.08 TP9.TP
  Bottom 0.15: v85.5,13.45 55,13.45 11.88,56.58 | v10.25,58.2 11.88,56.58 | 11.88,56.58 v22.75,67.45
EPD_CS  (via drill 0.3)
  Top 0.15: v85.5,15.95 85.25,15.7 85.25,15.2 J1.12 | v52.12,42.2 23.75,42.2 TP10.TP 23.62,42.33 23.12,42.33 20.38,45.08 20.38,45.95 U2.11
  Bottom 0.15: v85.5,15.95 73.12,28.32 66,28.32 v52.12,42.2
EPD_DC  (via drill 0.3)
  Top 0.15: v84,12.95 85.62,14.57 85.62,15.07 J1.11 | v21.5,38.33 20.5,39.33 TP11.TP 20.38,39.45 18.62,39.45 12.75,45.33 12.75,45.95 U2.5
  Bottom 0.15: v84,12.95 46.88,12.95 v21.5,38.33
EPD_RST  (via drill 0.3)
  Top 0.15: v86.25,16.57 86.25,15.2 J1.10 | v86.5,55.45 86.62,55.58 86.62,63.83 88.88,66.08 88.88,105.95 87.75,107.08 TP12.TP | v19.75,62.33 17.38,62.33 16.62,63.08 16.62,63.45 U2.21
  Bottom 0.15: v86.25,16.57 86.25,25.32 88.62,27.7 88.62,53.33 v86.5,55.45 84.5,57.45 28,57.45 23.12,62.33 v19.75,62.33
FLASH_CS  (via drill 0.3)
  Top 0.15: v29.38,56.58 30.12,57.33 U1.1 | v23.75,47.7 23,46.95 22.25,46.95 21.62,46.33 21.62,46.08 U2.12
  Bottom 0.15: v29.38,56.58 29.38,53.33 v23.75,47.7
GDR
  Top 0.15: R4.2 65.88,5.82 64.75,4.7 55.38,4.7 54.88,5.2 54.88,9.7 58.38,13.2 Q3.1
  Top 0.152: J1.2 90.2,14.2 86.7,10.7 75,10.7 69.9,5.6 69.9,5.2 69.5,4.8 66.9,4.8 65.88,5.82
GND  (via drill 0.3, 0.35)
  Top 0.15: U1.4 30.25,53.58 32.12,53.58 34,55.45 U1.9 34.12,55.58 38.38,55.58 38.62,55.83 | 46.12,99.95 46.25,100.08 50.12,100.08 C_DELAY.2 | 46.12,99.95 45.25,99.08 43.62,99.08 IC1.3 43.5,98.95 23.5,98.95 15.62,91.08 J4.G2 15.5,90.95 14.75,90.2 14.75,87.2 15.5,86.45 15.5,85.45 J4.G1 15.62,85.33 38.62,62.33 38.62,55.83 | 12.12,52.08 12.12,53.2 U2.29_2 | 13.38,52.08 13.38,53.2 U2.29_5 | 12.12,52.08 13.25,52.08 U2.29_4 13.38,52.08 | 12.12,52.08 U2.29_1 12,51.95 7.75,47.7 7.75,46.08 U2.1 | 13.38,52.08 14.5,52.08 U2.29_7 14.62,52.08 14.62,53.2 U2.29_8 14.62,53.33 14.62,54.45 U2.29_9 14.5,54.58 13.38,54.58 U2.29_6 13.25,54.58 12.12,54.58 U2.29_3 12,54.58 v12,55.83 | v8.88,58.95 8.88,60.45 7.75,61.58 7.75,63.45 U2.28 7.62,63.58 1.38,69.83 1.38,82.33 J4.G3 1.38,82.45 1.38,89.2 4.88,92.7 | C6.2 45.38,108.45 46.62,108.45 47.12,107.95 BOOT_BUTTON.1 | BOOT_BUTTON.1 47.25,107.95 50.62,107.95 BOOT_BUTTON.2 50.75,107.95 51.38,108.58 51.5,108.58 51.75,108.83 51.75,108.95 52,109.2 59.88,109.2 60.38,108.7 C10.2 60.5,108.58 61.62,108.58 62.25,107.95 | 62.25,107.95 65.75,107.95 CHANGE_BUTTON.2 | 62.25,107.95 CHANGE_BUTTON.1 | 21.88,107.58 22.12,107.83 RESET_BUTTON.1 | 21.88,107.58 16.75,102.45 15.88,102.45 C9.2 15.75,102.45 15.38,102.45 9.62,108.2 TP4.TP 3.5,108.2 TP5.TP 3.38,108.08 2.38,107.08 2.38,95.58 J4.G4 2.38,95.45 2.38,95.08 4.38,93.08 4.5,93.08 4.88,92.7 | 21.88,107.58 20.75,108.7 C5.2 | 21.88,107.58 RESET_BUTTON.1 | RESET_BUTTON.1 22.25,107.95 25.62,107.95 RESET_BUTTON.2 25.75,107.95 26.12,108.33 28.12,108.33 29.88,106.58 45.5,106.58 | 45.5,106.58 45.88,106.58 47.12,107.83 BOOT_BUTTON.1
  Top 0.15: 4.88,92.7 J4.P6 | v45.5,100.58 46.12,99.95 | 45.5,106.58 v45.5,106.45 | 149.75,48.58 150.75,49.58 151,49.58 D1.2 151.12,49.7 151.5,49.7 154.88,53.08 154.88,55.58 R2-USB.2 155.62,56.33 161.88,56.33 163.25,57.7 | 149.75,48.58 147.62,46.45 147.62,45.33 C5_USB.2 | 149.75,48.58 145.5,52.83 R2-USB1.1 145.38,52.95 143.25,55.08 139.7,55.08 | 139.7,55.08 128.38,55.08 C2_BAT.2 | U5.2 129.5,50.33 130.12,50.33 134.62,45.83 135.62,45.83 138.3,48.5 138.3,53.67 139.7,55.08 | J2.B1 164.38,57.33 164.38,57.58 J2.A12 164.38,57.7 163.25,57.7 | 163.25,57.7 164.88,59.33 J2.MP4 165,59.33 168.88,59.33 J2.MP2 169,59.33 169,49.2 J2.MP1 | J2.B12 164.38,51.2 164.38,50.95 J2.A1 164.5,50.83 164.5,49.58 164.88,49.2 J2.MP3 165,49.2 168.88,49.2 J2.MP1 | 167.75,41 167.75,47.95 168.88,49.08 J2.MP1 | 167.75,41 167.75,19.82 165.75,17.82 165.38,17.82 J3.1 | 127.5,41.83 127.5,41.08 127.75,40.83 C3.- 127.88,40.7 128.62,39.95 132.12,39.95 C1_BAT2.2 132.25,39.95 146.88,39.95 | 127.5,41.83 127.5,43.2 R2_BAT.1 | 146.88,39.95 156.5,39.95 160.12,43.58 C4_USB.2 | U3.13 86,47.45 86,47.83 87.25,49.08 92.75,49.08 C8.2 92.88,49.2 95,49.2 95.25,49.45 C10_SUPERCAP.1 95.38,49.45 v95.38,50.58 | 100.38,56.45 100.5,56.58 U4.9 | 100.38,56.45 101.38,56.45 U4.6 | 100.38,56.45 U4.9 | 119.5,39.7 120.38,39.7 120.88,40.2 121.12,40.2 IC4.2 | 119.5,39.7 R1_PWRUSB.1 114,39.7 106.62,47.08 106.62,53.45 102.38,57.7 101,57.7 100.5,57.2 100.5,56.7 U4.9 | 119.5,39.7 117.38,41.83 | 117.38,41.83 116.25,42.95 116.25,51.45 C1_BAT.2 | v97.12,52.33 97.12,53.58 99.38,55.83 U4.4 99.58,55.94 99.94,55.94 100.09,56.09 100.09,56.17 100.38,56.45
  Top 0.15: 117.38,41.83 127.5,41.83 | 146.88,39.95 150.51,36.31 | 150.51,36.31 150.6,36.22 | 112.75,26.5 112.75,8.82 113.38,8.2 D12.1 113.5,8.2 116.62,8.2 D11.1 116.75,8.07 117.62,8.07 117.88,7.82 119.38,7.82 119.75,8.2 D10.1 119.88,8.32 122.88,8.32 D9.1 123,8.32 126,8.32 D6.1 126.12,8.32 129.25,8.32 D8.1 129.38,8.32 132.38,5.32 156.88,5.32 157.12,5.57 157.12,6.32 156.88,6.57 154.62,6.57 154.12,7.07 C1.2 | 112.75,26.5 112.75,32.45 114.75,34.45 C1_BAT1.2 | C2.2 153,7.2 154,7.2 C1.2 | 154.12,8.95 154.12,7.2 C1.2 | 154.12,8.95 154.12,10.82 SENSOR2.7 154.25,10.95 153.38,11.82 153.38,13.7 SENSOR2.1 | 154.12,8.95 155.75,10.57 155.75,10.82 SENSOR2.5 | SJ1.1 55.75,6.07 56.38,5.45 56.38,5.32 56.62,5.07 60.25,5.07 60.62,5.45 R2.1 60.75,5.57 64.38,5.57 64.62,5.82 R4.1 64.75,5.95 64.75,15.95 66.25,17.45 EPD_C2.2 66.38,17.45 v72,17.45 | EPD_C12.2 79,23.82 80.62,23.82 EPD_C11.2 80.75,23.7 82.38,23.7 EPD_C10.2 82.5,23.7 84.12,23.7 EPD_C9.2 84.25,23.7 86,23.7 EPD_C8.2 86.12,23.7 87.62,23.7 EPD_C7.2 87.75,23.7 89.38,23.7 | 90.12,22.57 90.12,22.95 89.38,23.7 | 90.12,22.57 90.12,21.95 90,21.82 89,21.82 82.75,15.57 82.75,15.2 J1.17 | 89.38,23.7 EPD_C6.2 | 87.25,15.07 J1.8 87.2,15.5 88,16.3 98.87,16.3 EPD_C1.2 | EPD_C1.2 101.38,18.7 | 92,22.95 95.38,22.95 C7.2 95.5,22.82 99.5,18.82 101.25,18.82 EPD_C1.2 | 92,22.95 91.25,23.7 EPD_C5.2 91.12,23.82 91.12,27.32 83.75,34.7 83.75,35.08 D3.1 | v90.25,22.57 90.12,22.57 | 92,22.95 v92,22.57 | 38.62,55.83 42.88,51.58 v42.88,46.58 | 99.77,57.35 99.85,57.35 100.47,56.73 U4.9 | v102.62,22.57 108.83,22.57 112.75,26.5 | 150.51,36.31 163.06,36.31 167.75,41
  Top 0.152: 99.77,57.35 U4.1
  Bottom 0.15: v8.88,58.95 v12,55.83 | v45.5,106.45 v45.5,100.58 | v97.12,52.33 v95.38,50.58 95.38,22.57 | 95.38,22.57 v92,22.57 v90.25,22.57 90.25,19.95 85.75,15.45 77.75,15.45 75.75,17.45 v72,17.45 v42.88,46.58 | 95.38,22.57 v102.62,22.57
  other vias: 63.3,79.6 43.7,61.7 55.8,50.8 42.5,32.4 28.5,49.8 12.4,49.5 8.1,65.4 9.7,51.5 7.6,60.9 47.6,58.6 73.8,22.8 141.4,30.7 136.5,54.5 96.3,55.7 34,40.4 31.9,45.5 17.9,41.7 11.6,60.3 14.3,65.6 17.2,65.3 22.2,65.1 4.9,71.9 92.9,55.6 88.3,71.1 90.7,60.1 86.9,35.1 93.6,30.7
  pour Top: 75.66,10.06 75.68,10.08 93.92,10.08 93.94,10.06 93.96,10.04 93.98,10.02 93.98,0.08 170.22,0.08 170.22,67.12 92.18,67.12 92.16,67.14 92.14,67.16 92.12,67.18 92.12,111.12 68.48,111.12 68.48,110.18 68.46,110.16 68.44,110.14 68.42,110.12 19.08,110.12 19.06,110.14 19.04,110.16 19.02,110.18 19.02,111.12 0.08,111.12 0.08,64.08 6.42,64.08 6.44,64.06 6.46,64.04 6.48,64.02 6.48,45.48 6.46,45.46 6.44,45.44 6.42,45.42 0.08,45.42 0.08,0.08 75.62,0.08 75.62,10.02 75.64,10.04
  pour Bottom: 75.66,10.06 75.68,10.08 93.92,10.08 93.94,10.06 93.96,10.04 93.98,10.02 93.98,0.08 170.22,0.08 170.22,67.12 92.18,67.12 92.16,67.14 92.14,67.16 92.12,67.18 92.12,111.12 68.48,111.12 68.48,110.18 68.46,110.16 68.44,110.14 68.42,110.12 19.08,110.12 19.06,110.14 19.04,110.16 19.02,110.18 19.02,111.12 0.08,111.12 0.08,64.08 6.42,64.08 6.44,64.06 6.46,64.04 6.48,64.02 6.48,45.48 6.46,45.46 6.44,45.44 6.42,45.42 0.08,45.42 0.08,0.08 75.62,0.08 75.62,10.02 75.64,10.04
GPIO8  (via drill 0.3)
  Top 0.15: v13.12,39.83 7,39.83 R1.2 | v18,44.7 19,45.7 19,45.95 U2.10
  Bottom 0.15: v13.12,39.83 v18,44.7
I2C_PW  (via drill 0.3)
  Top 0.15: SENSOR2.6 154.88,10.95 154.88,11.2 154.25,11.82 154.25,13.7 SENSOR2.2 154.12,13.82 154.12,14.07 153.62,14.57 149.62,14.57 | R2-PINH.1 156.38,5.95 155.25,5.95 R1_PINH.1 155.12,5.95 154.12,5.95 C1.1 154,5.95 153,5.95 C2.1 152.88,5.95 152.25,6.57 152.25,7.7 153.25,8.7 153.25,10.82 SENSOR2.8 153.25,10.95 149.62,14.57 | v27.75,57.08 21.62,63.2 21.62,63.45 U2.17 | v85.38,43.33 102.5,43.33 110.62,35.2 129,35.2 149.62,14.57
  Bottom 0.15: v27.75,57.08 71.62,57.08 v85.38,43.33
INT_RTC  (via drill 0.3)
  Top 0.15: v91.12,59.45 92.75,57.83 R1_PINH1.1 | v87.25,59.45 87.25,56.7 U3.3 | 23.88,37.4 23.88,8.82 19.25,4.2 TP15.TP | 23.88,37.4 23.88,38.2 16.62,45.45 16.62,45.95 U2.8 | v68.5,57.95 49.65,39.1 25.57,39.1 23.88,37.4
  Bottom 0.15: v91.12,59.45 v87.25,59.45 84.25,59.45 82.75,57.95 v68.5,57.95
IO/BOOT  (via drill 0.3)
  Top 0.15: C6.1 45.25,107.2 45.25,107.45 44.62,108.08 44.62,108.95 45,109.33 47.12,109.33 BOOT_BUTTON.4 47.25,109.33 v49.5,109.33 50.62,109.33 BOOT_BUTTON.3 | v52.38,106.45 52.38,107.2 R_BOOT.1 | v24.25,65.08 24.25,63.58 U2.15
  Bottom 0.15: v49.5,109.33 v52.38,106.45 24.25,78.33 v24.25,65.08
IO/CHANGE  (via drill 0.3)
  Top 0.15: v59.75,108.08 60.38,107.45 C10.1 | 62.25,109.45 v61.12,109.45 | v67.5,106.58 67.5,107.33 R_CHANGE.1 | 62.25,109.45 65.75,109.45 CHANGE_BUTTON.3 | 62.25,109.45 CHANGE_BUTTON.4 | v25.62,65.95 16.12,65.95 14,63.83 14,63.58 U2.23
  Bottom 0.15: v67.5,106.58 64,106.58 v61.12,109.45 v59.75,108.08 25.62,73.95 v25.62,65.95
MISO  (via drill 0.3)
  Top 0.15: 5.62,93.83 5.25,93.83 J4.P7 5.62,93.83 | 5.62,93.83 6.5,94.7 6.5,100.83 TP6.TP | v15.12,61.08 20.12,56.08 30.12,56.08 U1.2 | v8.88,61.08 8.88,63.45 U2.27 | v6.75,92.7 5.62,93.83
  Bottom 0.15: v8.88,61.08 9.88,61.08 | 9.88,61.08 v15.12,61.08 | v6.75,92.7 6.75,69.45 9.88,66.33 9.88,61.08
MOSI  (via drill 0.3)
  Top 0.15: v83.5,13.95 84.12,14.57 84.12,15.07 J1.14 | v38.5,52.95 38,53.45 U1.5 | TP7.TP 12.62,5.7 22,15.07 22,39.58 20.88,40.7 20.25,40.7 15.38,45.58 15.38,45.95 U2.7 15.25,46.08 15.25,46.33 v14.38,47.2 | v6.75,67.08 6.75,88.45 5.88,89.33 5.25,89.33 J4.P3 | v21.62,44.45 v26.75,44.45
  Bottom 0.15: v83.5,13.95 68.25,13.95 38.5,43.7 38.5,44.45 | v38.5,52.95 38.5,44.45 | v6.75,67.08 6.75,64.7 8.38,63.08 8.38,58.58 14.38,52.58 14.38,51.7 | v14.38,47.2 14.38,51.7 | v26.75,44.45 38.5,44.45 | 14.38,51.7 v21.62,44.45
N$1
  Top 0.15: R_CAPACITOR.1 88,58.95 88,60.33 87.62,60.7 D7.1
N$2  (via drill 0.3)
  Top 0.15: v128.5,3.7 129.25,3.7 R10.1 | v128.5,9.07 129.25,9.82 D8.2
  Bottom 0.15: v128.5,9.07 v128.5,3.7
N$3  (via drill 0.3)
  Top 0.15: v127,4.32 126.25,3.57 R9.1 | v127,8.95 126.12,9.82 D6.2
  Bottom 0.15: v127,8.95 v127,4.32
N$4  (via drill 0.3)
  Top 0.15: v124,4.2 123.38,3.57 R5.1 | v124,8.82 123,9.82 D9.2
  Bottom 0.15: v124,8.82 v124,4.2
N$5  (via drill 0.3)
  Top 0.15: v120.88,4.2 120.25,3.57 R6.1 | v120.88,8.82 119.88,9.82 D10.2
  Bottom 0.15: v120.88,8.82 v120.88,4.2
N$6  (via drill 0.3)
  Top 0.15: v118,3.57 117.25,3.57 R7.1 | v118,8.32 116.75,9.57 D11.2
  Bottom 0.15: v118,8.32 v118,3.57
N$7  (via drill 0.3)
  Top 0.15: v115,3.57 114.12,3.57 R8.1 | v114.25,8.82 113.5,9.57 D12.2
  Bottom 0.15: v115,3.57 115,8.07 v114.25,8.82
N$8
  Top 0.15: IC1.5 46.38,100.95 49.62,100.95 50.12,101.45 C_DELAY.1
N$9  (via drill 0.3)
  Top 0.15: v154.38,54.2 145.5,54.2 R2-USB1.2 | v162.75,53.45 163.25,52.95 164.38,52.95 J2.A5
  Bottom 0.15: v154.38,54.2 162,54.2 v162.75,53.45
N$10  (via drill 0.3)
  Top 0.15: v116.25,34.7 114.88,33.33 C1_BAT1.1 | v116.25,38.33 116.88,38.95 D2.1 117,39.08 117.25,39.33 121.12,39.33 IC4.3 121.25,39.33 121.88,39.95 121.88,40.7 121.75,40.83 121.62,40.83 121.25,41.2 IC4.1 | v135,44.33 136,44.33 Q1.2
  Bottom 0.15: v116.25,34.7 v116.25,38.33 122.25,44.33 v135,44.33
N$11  (via drill 0.3)
  Top 0.15: v125.12,49.08 122.12,49.08 R1_BAT.2 | v128.38,49.08 129,49.08 U5.1
  Bottom 0.15: v128.38,49.08 v125.12,49.08
N$12
  Top 0.15: CHG_LED.C 120.62,49.08 R1_BAT.1
N$13
  Top 0.15: R2-USB.1 155.62,55.08 162.88,55.08 163.75,55.95 164.38,55.95 J2.B5
N$16  (via drill 0.3)
  Top 0.15: v127.38,46.08 127.38,44.7 R2_BAT.2 | v127.38,48.58 127.38,48.95 126.88,49.45 U5.5
  Bottom 0.15: v127.38,48.58 v127.38,46.08
N$20
  Top 0.15: J1.22 80.25,15.2 80.25,20.32 82.38,22.45 EPD_C10.1
N$22
  Top 0.15: C4.1 94,32.08 93.25,32.08 92.75,32.58 89.38,32.58 88.75,31.95 D4.1 88.62,31.95 84.88,35.7 83,35.7 82.5,35.2 80.25,35.2 D3.2
N$23
  Top 0.15: J1.24 79.12,15.2 79.12,22.32 79,22.45 EPD_C12.1
N$25
  Top 0.15: J1.20 81.25,15.2 81.25,17.57 86,22.32 EPD_C8.1
N$26
  Top 0.15: EPD_C7.1 81.75,16.45 81.75,15.2 J1.19
N$27
  Top 0.15: J1.18 82.25,15.2 82.25,15.57 89,22.32 89.38,22.32 EPD_C6.1
N$28  (via drill 0.3)
  Top 0.15: v88.62,14.32 88.62,15.07 J1.5 | v68.25,14.57 68,14.57 66.38,16.2 EPD_C2.1
  Bottom 0.15: v88.62,14.32 83.75,14.32 83.5,14.57 v68.25,14.57
N$30
  Top 0.15: J1.4 89.25,15.2 89.25,15.57 89.58,15.9 99.83,15.9 101.25,17.32 EPD_C1.1
PREVGH  (via drill 0.3)
  Top 0.15: 84.12,22.32 80.75,18.95 80.75,15.2 J1.21 | v87.75,27.45 88.62,28.32 D5.1 | 84.12,22.32 v83.38,23.07 | 84.12,22.32 EPD_C9.1
  Bottom 0.15: v83.38,23.07 v87.75,27.45
PREVGL
  Top 0.15: J1.23 79.75,15.2 79.75,21.45 80.62,22.32 EPD_C11.1 80.62,22.45 80,23.07 78.5,23.07 76.62,24.95 76.62,26.32 77,26.7 77,33.2 79.88,36.08 89.75,36.08 93.12,32.7 94.5,32.7 94.75,32.45 94.75,31.57 94.62,31.45 93.38,31.45 93,31.82 92.25,31.82 D4.2
RESE  (via drill 0.3)
  Top 0.15: v89.25,14.2 89.62,14.57 89.62,15.07 J1.3 | v64,11.2 63.5,11.2 63.38,11.07 R3.2 63.25,11.07 61.12,13.2 59.75,13.2 Q3.2
  Bottom 0.15: v89.25,14.2 86.25,11.2 v64,11.2
RESE'
  Top 0.15: SJ1.2 57.38,6.2 57.88,6.7 60.62,6.7 R2.2 60.75,6.82 61.88,7.95 61.88,10.95 R3.1
RESET  (via drill 0.3)
  Top 0.15: C5.1 20.62,107.58 19.88,108.33 19.88,109.2 20,109.33 22.12,109.33 RESET_BUTTON.4 22.25,109.45 25.62,109.45 RESET_BUTTON.3 25.75,109.33 27.25,109.33 27.5,109.08 R_RESET.1 27.62,108.95 v34,108.95 | v42,100.95 43.5,100.95 IC1.1 | v10.25,47.2 10.25,46.08 U2.3 | v10.25,55.58 v15.12,60.45
  Bottom 0.15: v34,108.95 v42,100.95 23.88,82.83 23.88,69.2 v15.12,60.45 | v10.25,55.58 v10.25,47.2
RTC_RST  (via drill 0.3)
  Top 0.15: v26.38,59.7 23,63.08 23,63.45 U2.16 | v83.25,59.7 85.88,57.08 85.88,56.7 U3.4
  Bottom 0.15: v83.25,59.7 v26.38,59.7
RX  (via drill 0.3)
  Top 0.15: v12.75,65.95 12.75,63.58 U2.24 | v12.75,70.08 12.75,71.2 12.5,71.45 TP2.TP
  Bottom 0.15: v12.75,70.08 v12.75,65.95
SCK  (via drill 0.3)
  Top 0.15: v84.88,15.95 84.75,15.82 84.75,15.2 J1.13 | U1.6 v38.88,54.83 | v13.88,44.83 13.88,45.95 U2.6 | v9,37.83 9,4.7 TP8.TP | v6.25,90.95 5.75,91.45 5.25,91.45 J4.P5 | v9.38,61.58 9.38,56.83 v9.12,56.58 | v25.62,43.95 v22.12,43.95
  Bottom 0.15: v84.88,15.95 77.75,15.95 v38.88,54.83 36.5,54.83 v25.62,43.95 | 13.88,42.95 13.88,42.7 v9,37.83 | 13.88,42.95 v13.88,44.83 14.25,45.2 18.12,45.2 19.38,43.95 v22.12,43.95 | v6.25,90.95 6.25,69.45 9.38,66.33 v9.38,61.58 | v9.12,56.58 9.12,47.7 13.88,42.95
SCL  (via drill 0.3)
  Top 0.15: 156,13.45 155.75,13.7 SENSOR2.4 | 156,13.45 156.88,12.57 156.88,10.32 156.5,9.95 156.5,7.32 R2-PINH.2 | v163.75,20.82 165.25,20.82 J3.4 | 156,13.45 v156.38,13.45 | v90.5,48.2 89.75,47.45 U3.16 | U4.7 101.5,56.83 101.88,56.83 102.12,56.58 102.12,55.7 98.25,51.83 v94.12,51.83 94.12,58.95 91.12,61.95 v91.12,66.45 | v25.25,65.45 25.12,65.58 19.62,65.58 17.88,63.83 17.88,63.58 U2.20
  Bottom 0.15: v163.75,20.82 v156.38,13.45 136.62,13.45 96.62,53.45 95.75,53.45 v94.12,51.83 v90.5,48.2 | v25.25,65.45 88.75,65.45 89.75,66.45 v91.12,66.45
SDA  (via drill 0.3)
  Top 0.15: 156.25,12.2 156.25,10.2 155.25,9.2 155.25,7.32 R1_PINH.2 | 156.25,12.2 155,13.45 155,13.7 SENSOR2.3 | v163.88,19.7 165.25,19.7 J3.3 | 156.25,12.2 v156.38,12.2 | 102.12,57.08 102.5,56.7 102.5,55.45 v101,53.95 | 102.12,57.08 101.88,57.33 101.5,57.33 U4.8 | v89.12,48.58 89.12,48.08 88.5,47.45 U3.15 | 102.12,57.08 v102.25,57.2 | U2.19 19.12,63.58 19.12,63.83 19.88,64.58 21.64,64.58 21.64,64.55 22.75,64.55 22.75,64.58 v23.5,64.58
  Bottom 0.15: v156.38,12.2 v163.88,19.7 163.88,20.32 164.25,20.7 164.25,35.33 142.38,57.2 v102.25,57.2 93.5,65.95 89.75,65.95 88.38,64.58 v23.5,64.58 | v101,53.95 94.5,53.95 v89.12,48.58
SRC  (via drill 0.3)
  Top 0.15: C4.2 94.12,33.33 94.38,33.33 95.12,32.58 95.12,31.32 92.25,28.45 D5.2 92.12,28.45 90.62,28.45 v88.12,30.95 | v72.5,28.82 59.12,15.45 Q3.3 | v78.12,28.82 81.88,32.58 L1.1
  Bottom 0.15: v72.5,28.82 v78.12,28.82 80.25,30.95 v88.12,30.95
SS_SD  (via drill 0.3)
  Top 0.15: v11.38,47.2 11.38,46.08 U2.4 | v6.25,68.83 6.25,87.58 5.62,88.2 J4.P2
  Bottom 0.15: v11.38,47.2 11.38,55.08 6.88,59.58 6.88,64.08 6.25,64.7 v6.25,68.83
TX  (via drill 0.3)
  Top 0.15: v12.25,64.83 11.5,64.08 11.5,63.58 U2.25 | v16.88,69.45 17.75,69.45 18.25,69.95 TP1.TP
  Bottom 0.15: v16.88,69.45 v12.25,64.83
USB_D+  (via drill 0.3)
  Top 0.15: v148.38,50.58 151,50.58 D1.1 | v55.38,58.45 43,46.08 24.25,46.08 U2.14
  Bottom 0.15: v148.38,50.58 105.12,50.58 90.12,65.58 89.88,65.58 82.75,58.45 v55.38,58.45
USB_D-  (via drill 0.3)
  Top 0.15: v152.12,49.33 151.5,48.7 151.12,48.7 D1.3 | v64.5,66.95 42.5,44.95 23.62,44.95 23,45.58 23,45.95 U2.13
  Bottom 0.15: v152.12,49.33 134.62,66.83 91.38,66.83 91.25,66.95 v64.5,66.95
VBAT
  Top 0.3: Q1.3 130.32,51.35 U5.3 129.38,52.78 C2_BAT.1 124.79,53.81 115.8,62.8 TP3.TP 101.2,62.8 97.8,59.4 97.8,58.15 99.01,56.94 99.4,56.94 U4.2 U4.3
VBUS
  Top 0.3: C4_USB.1 158.84,43.56 | 158.84,43.56 156.41,41.14 PFMF.050.1.2 150.47,43.8 147.2,43.8 146.26,44.74 C5_USB.1 140.88,45.28 138.6,43 134.9,43 134.21,43.69 Q1.1 129.79,44.41 125.7,48.5 125.7,50 126,50.3 126.6,50.3 126.78,50.48 U5.4 125.88,50.45 CHG_LED.A 122.13,51.87 121,53 115.6,53 114.89,52.29 C1_BAT.1 107.48,58.97 TP14.TP 107.05,48.07 R1_PWRUSB.2 114.26,41.14 D2.2 | D1.5 153.9,49.21 154.25,49.21 158.84,44.62 158.84,43.56
VRTC
  Top 0.3: R_CAPACITOR.2 91.15,58.85 92,58 92,51.6 92.4,51.2 97,51.2 97.9,50.3 97.9,47.9 97.25,47.25 C10_SUPERCAP.2 93.39,47.25 C8.1 91.99,47.79 90.24,46.04 87.86,46.04 87.3,46.6 87.25,46.7 87.25,47.33 U3.14
VUSB
  Top 0.3: PFMF.050.1.1 161.09,38.89 164.4,42.2 164.4,46.9 162.7,48.6 162.7,51.5 162.91,51.71 J2.A4 J2.B9 164.47,52.08 165.09,52.08 165.6,52.6 165.6,55.92 165.01,56.51 J2.B4 J2.A9